# EAGLE board ratFinkSmall (EAGLE 8.4.1)
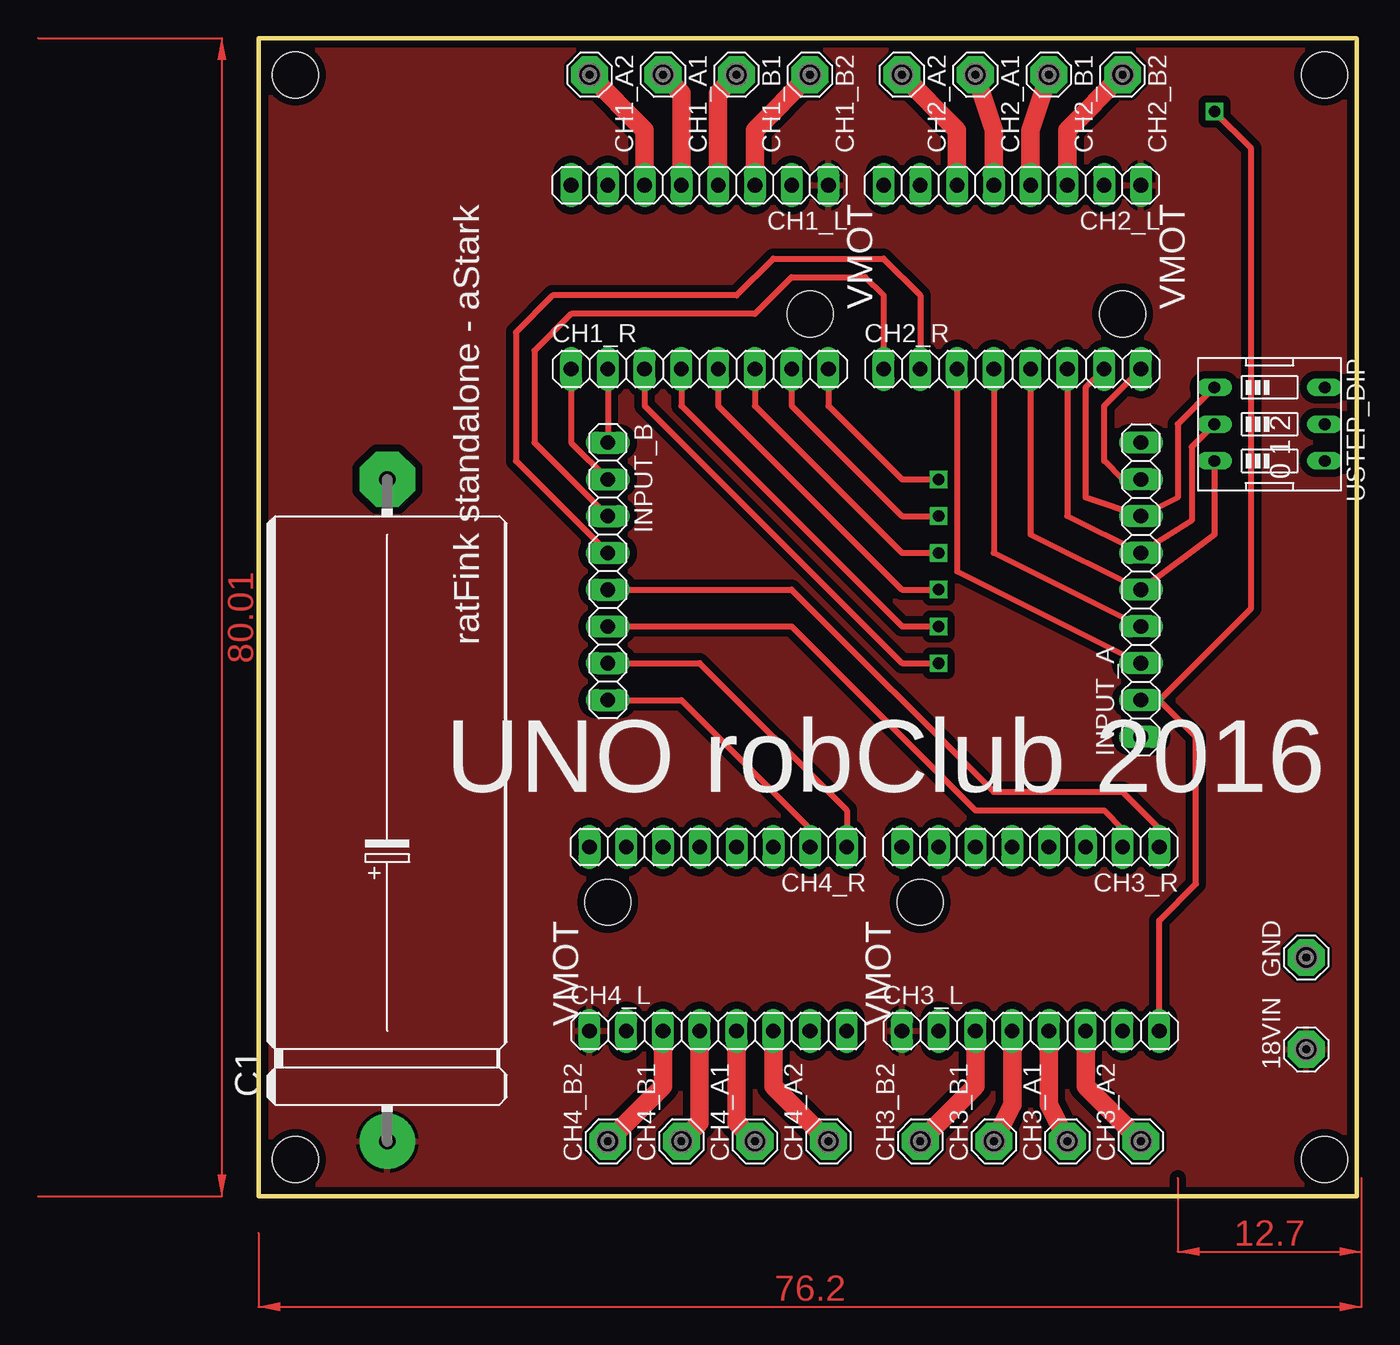
[diagram p0: board, top side]
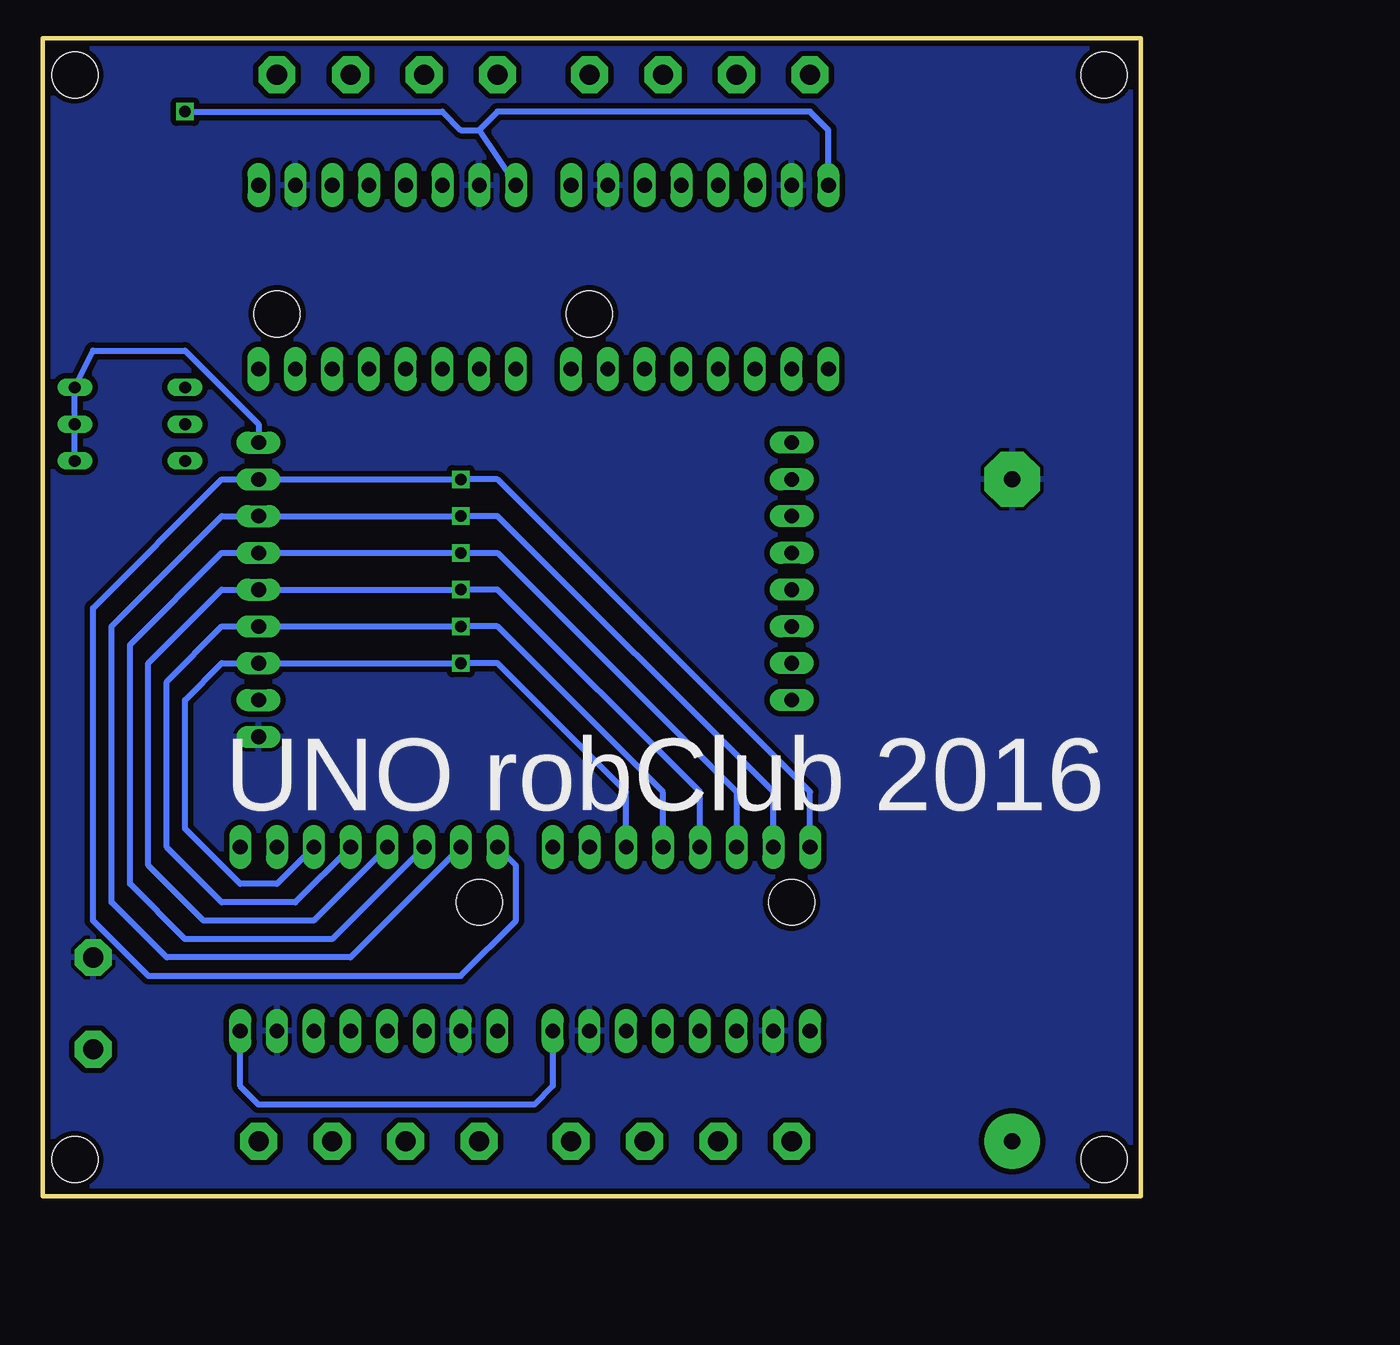
[diagram p1: board, bottom side, seen from below]

Size 75.87 x 80 mm. Coordinates in mm from the lower left corner, seen from the top.
Outline: 0,0 75.87,0 75.87,80 0,80 0,0
Copper layers (1*16): Top 0.0356mm / dielectric 1.5011mm / Bottom 0.0356mm
Design rules "oshpark-2layer *": minimum track width 6mil, minimum drill 13mil, track to track 10mil, track to pad 6mil, pad to pad 6mil, via to via 6mil, smd to smd 6mil, copper to edge 15mil, drill to drill 6mil, minimum pad ring 7mil, minimum via ring 7mil, stop-mask expansion 2.5mil, vias tented up to drill 0mil, thermal gap 10mil
Holes 3.17 mm at 2.54,77.47 73.66,77.47 73.66,2.54 2.54,2.54 38.1,60.96 59.69,60.96 45.72,20.32 24.13,20.32

## Footprints (pad centres in the part's own frame; a part is rotated, then mirrored left to right if it is on the bottom)
SE14 = drill 1.397 pad 2.54 octagon: MP 0,0
E45-16 = drill 1.118 pad 3.81: + -22.86,0 | drill 1.118 pad 3.81 octagon: - 22.86,0
1X08 = drill 1.016 long: 1 -8.89,0; 2 -6.35,0; 3 -3.81,0; 4 -1.27,0; 5 1.27,0; 6 3.81,0; 7 6.35,0; 8 8.89,0
1X09 = drill 1.016 long: 1 -10.16,0; 2 -7.62,0; 3 -5.08,0; 4 -2.54,0; 5 0,0; 6 2.54,0; 7 5.08,0; 8 7.62,0; 9 10.16,0
EDG-03 = drill 0.813 long: 1 -2.54,-3.81; 2 0,-3.81; 3 2.54,-3.81; 4 2.54,3.81; 5 0,3.81; 6 -2.54,3.81

## Placement (x,y rotation side)
18VIN  SE14  [SE14]  72.39,10.16 90 top
C1  100 uF  [E45-16]  8.89,26.67 90 top
CH1_A1  SE14  [SE14]  27.94,77.47 270 top
CH1_A2  SE14  [SE14]  22.86,77.47 270 top
CH1_B1  SE14  [SE14]  33.02,77.47 270 top
CH1_B2  SE14  [SE14]  38.1,77.47 270 top
CH1_L  [1X08]  30.48,69.85 180 top
CH1_R  [1X08]  30.48,57.15 0 top
CH2_A1  SE14  [SE14]  49.53,77.47 270 top
CH2_A2  SE14  [SE14]  44.45,77.47 270 top
CH2_B1  SE14  [SE14]  54.61,77.47 270 top
CH2_B2  SE14  [SE14]  59.69,77.47 270 top
CH2_L  [1X08]  52.07,69.85 180 top
CH2_R  [1X08]  52.07,57.15 0 top
CH3_A1  SE14  [SE14]  55.88,3.81 90 top
CH3_A2  SE14  [SE14]  60.96,3.81 90 top
CH3_B1  SE14  [SE14]  50.8,3.81 90 top
CH3_B2  SE14  [SE14]  45.72,3.81 90 top
CH3_L  [1X08]  53.34,11.43 0 top
CH3_R  [1X08]  53.34,24.13 180 top
CH4_A1  SE14  [SE14]  34.29,3.81 90 top
CH4_A2  SE14  [SE14]  39.37,3.81 90 top
CH4_B1  SE14  [SE14]  29.21,3.81 90 top
CH4_B2  SE14  [SE14]  24.13,3.81 90 top
CH4_L  [1X08]  31.75,11.43 0 top
CH4_R  [1X08]  31.75,24.13 180 top
GND  SE14  [SE14]  72.39,16.51 90 top
INPUT_A  [1X09]  60.96,41.91 90 top
INPUT_B  [1X08]  24.13,43.18 270 top
USTEP_DIP  [EDG-03]  69.85,53.34 270 top

## Library data of the parts
18VIN CH1_A1 CH1_A2 CH1_B1 CH1_B2 CH2_A1 CH2_A2 CH2_B1 CH2_B2 CH3_A1 CH3_A2 CH3_B1 CH3_B2 CH4_A1 CH4_A2 CH4_B1 CH4_B2 GND = solpad
C1 = resistor
CH1_L CH1_R CH2_L CH2_R CH3_L CH3_R CH4_L CH4_R INPUT_A INPUT_B = pinhead
USTEP_DIP = special

## Nets
5VIN: INPUT_A.9 USTEP_DIP.4 USTEP_DIP.5 USTEP_DIP.6
18VIN: 18VIN.MP C1.+ CH1_L.1 CH2_L.1 CH3_L.1 CH4_L.1
CH1_A1: CH1_A1.MP CH1_L.5
CH1_A2: CH1_A2.MP CH1_L.6
CH1_B1: CH1_B1.MP CH1_L.4
CH1_B2: CH1_B2.MP CH1_L.3
CH2_A1: CH2_A1.MP CH2_L.5
CH2_A2: CH2_A2.MP CH2_L.6
CH2_B1: CH2_B1.MP CH2_L.4
CH2_B2: CH2_B2.MP CH2_L.3
CH3_A1: CH3_A1.MP CH3_L.5
CH3_A2: CH3_A2.MP CH3_L.6
CH3_B1: CH3_B1.MP CH3_L.4
CH3_B2: CH3_B2.MP CH3_L.3
CH4_A1: CH4_A1.MP CH4_L.5
CH4_A2: CH4_A2.MP CH4_L.6
CH4_B1: CH4_B1.MP CH4_L.4
CH4_B2: CH4_B2.MP CH4_L.3
EN: CH1_R.8 CH2_R.8 CH3_R.8 CH4_R.8 INPUT_A.8
FLT: CH1_L.8 CH2_L.8 CH3_L.8 CH4_L.8 INPUT_A.2
GND: C1.- CH1_L.2 CH1_L.7 CH2_L.2 CH2_L.7 CH3_L.2 CH3_L.7 CH4_L.2 CH4_L.7 GND.MP INPUT_A.1
M0: CH1_R.7 CH2_R.7 CH3_R.7 CH4_R.7 INPUT_A.7 USTEP_DIP.1
M1: CH1_R.6 CH2_R.6 CH3_R.6 CH4_R.6 INPUT_A.6 USTEP_DIP.2
M2: CH1_R.5 CH2_R.5 CH3_R.5 CH4_R.5 INPUT_A.5 USTEP_DIP.3
N$1: CH2_R.1 INPUT_B.3
N$2: CH1_R.2 INPUT_B.1
N$3: CH1_R.1 INPUT_B.2
N$4: CH2_R.2 INPUT_B.4
N$6: CH4_R.1 INPUT_B.7
N$7: CH4_R.2 INPUT_B.8
N$8: CH3_R.1 INPUT_B.5
N$9: CH3_R.2 INPUT_B.6
RST: CH1_R.4 CH2_R.4 CH3_R.4 CH4_R.4 INPUT_A.4
SLP: CH1_R.3 CH2_R.3 CH3_R.3 CH4_R.3 INPUT_A.3

## Tracks (layer width: path | path; a pad name or v marks a point on that pad's centre or on a via)
5VIN
  Bottom 0.406: USTEP_DIP.4 USTEP_DIP.5 USTEP_DIP.6 72.39,58.42 66.04,58.42 60.96,53.34 INPUT_A.9
18VIN
  pour Top (isolate 0.508): 0,80.01 76.2,80.01 76.2,0 0,0
CH1_A1
  Top 1.27: CH1_A1.MP 29.21,76.2 CH1_L.5
CH1_A2
  Top 1.27: CH1_A2.MP 26.67,73.66 CH1_L.6
CH1_B1
  Top 1.27: CH1_B1.MP 31.75,76.2 CH1_L.4
CH1_B2
  Top 1.27: CH1_B2.MP 34.29,73.66 CH1_L.3
CH2_A1
  Top 1.27: CH2_A1.MP 50.8,73.66 CH2_L.5
CH2_A2
  Top 1.27: CH2_A2.MP 48.26,73.66 CH2_L.6
CH2_B1
  Top 1.27: CH2_B1.MP 53.34,73.66 CH2_L.4
CH2_B2
  Top 1.27: CH2_B2.MP 55.88,73.66 CH2_L.3
CH3_A1
  Top 1.27: CH3_A1.MP 54.61,6.35 CH3_L.5
CH3_A2
  Top 1.27: CH3_A2.MP 57.15,7.62 CH3_L.6
CH3_B1
  Top 1.27: CH3_B1.MP 52.07,6.35 CH3_L.4
CH3_B2
  Top 1.27: CH3_B2.MP 49.53,7.62 CH3_L.3
CH4_A1
  Top 1.27: CH4_A1.MP 33.02,5.08 CH4_L.5
CH4_A2
  Top 1.27: CH4_A2.MP 35.56,7.62 CH4_L.6
CH4_B1
  Top 1.27: CH4_B1.MP 30.48,5.08 CH4_L.4
CH4_B2
  Top 1.27: CH4_B2.MP 27.94,7.62 CH4_L.3
EN  (via drill 0.8)
  Top 0.406: CH1_R.8 39.37,54.61 44.45,49.53 v46.99,49.53 | INPUT_A.8 59.69,49.53 58.42,50.8 58.42,54.61 CH2_R.8
  Bottom 0.406: CH4_R.8 22.86,27.94 44.45,49.53 v46.99,49.53 INPUT_A.8 63.5,49.53 72.39,40.64 72.39,19.05 68.58,15.24 46.99,15.24 43.18,19.05 43.18,22.86 CH3_R.8
FLT  (via drill 0.8)
  Top 0.406: CH3_L.8 62.23,19.05 64.77,21.59 64.77,31.75 62.23,34.29 | 62.23,34.29 INPUT_A.2 62.23,34.29 | v66.04,74.93 68.58,72.39 68.58,40.64 62.23,34.29
  Bottom 0.406: CH1_L.8 21.59,73.66 22.86,74.93 44.45,74.93 45.72,73.66 | 45.72,73.66 CH2_L.8 | CH4_L.8 40.64,7.62 41.91,6.35 60.96,6.35 62.23,7.62 CH3_L.8 | v66.04,74.93 48.26,74.93 46.99,73.66 45.72,73.66
GND
  pour Bottom (isolate 0.381): 0,80.01 76.2,80.01 76.2,0 0,0
M0  (via drill 0.8)
  Top 0.406: CH1_R.7 36.83,54.61 44.45,46.99 v46.99,46.99 | CH2_R.7 57.15,55.88 57.15,48.26 INPUT_A.7 63.5,48.26 63.5,53.34 USTEP_DIP.1
  Bottom 0.406: CH4_R.7 25.4,27.94 44.45,46.99 v46.99,46.99 INPUT_A.7 63.5,46.99 71.12,39.37 71.12,20.32 67.31,16.51 54.61,16.51 CH3_R.7
M1  (via drill 0.8)
  Top 0.406: CH2_R.6 55.88,46.99 INPUT_A.6 64.47,46.69 64.47,51.77 USTEP_DIP.2 | CH1_R.6 34.29,54.61 44.45,44.45 v46.99,44.45
  Bottom 0.406: CH4_R.6 27.94,27.94 44.45,44.45 v46.99,44.45 INPUT_A.6 63.5,44.45 69.85,38.1 69.85,21.59 66.04,17.78 55.88,17.78 CH3_R.6
M2  (via drill 0.8)
  Top 0.406: CH1_R.5 31.75,54.61 44.45,41.91 v46.99,41.91 | CH2_R.5 53.34,45.72 INPUT_A.5 66.04,45.72 USTEP_DIP.3
  Bottom 0.406: CH4_R.5 30.48,27.94 44.45,41.91 v46.99,41.91 INPUT_A.5 63.5,41.91 68.58,36.83 68.58,22.86 64.77,19.05 57.15,19.05 CH3_R.5
N$1
  Top 0.406: CH2_R.1 43.18,62.23 41.91,63.5 36.83,63.5 34.29,60.96 21.59,60.96 19.05,58.42 19.05,52.07 INPUT_B.3
N$2
  Top 0.406: CH1_R.2 INPUT_B.1
N$3
  Top 0.406: CH1_R.1 21.59,52.07 INPUT_B.2
N$4
  Top 0.406: CH2_R.2 45.72,62.23 43.18,64.77 35.56,64.77 33.02,62.23 20.32,62.23 17.78,59.69 17.78,50.8 INPUT_B.4
N$6
  Top 0.406: INPUT_B.7 30.48,36.83 40.64,26.67 CH4_R.1
N$7
  Top 0.406: INPUT_B.8 29.21,34.29 38.1,25.4 CH4_R.2
N$8
  Top 0.406: INPUT_B.5 36.83,41.91 50.8,27.94 59.69,27.94 62.23,25.4 CH3_R.1
N$9
  Top 0.406: INPUT_B.6 36.83,39.37 49.53,26.67 58.42,26.67 59.69,25.4 CH3_R.2
RST  (via drill 0.8)
  Top 0.406: CH2_R.4 50.8,44.45 INPUT_A.4 | CH1_R.4 29.21,54.61 44.45,39.37 v46.99,39.37
  Bottom 0.406: CH4_R.4 33.02,27.94 44.45,39.37 v46.99,39.37 INPUT_A.4 63.5,39.37 67.31,35.56 67.31,24.13 63.5,20.32 58.42,20.32 CH3_R.4
SLP  (via drill 0.8)
  Top 0.406: CH2_R.3 48.26,43.18 INPUT_A.3 | CH1_R.3 26.67,54.61 44.45,36.83 v46.99,36.83
  Bottom 0.406: CH4_R.3 35.56,27.94 44.45,36.83 v46.99,36.83 INPUT_A.3 63.5,36.83 66.04,34.29 66.04,25.4 62.23,21.59 59.69,21.59 CH3_R.3
(copper drawn outside any net)
  shapes: Top area x3

## Text on the board
tPlace: VMOT | VMOT | VMOT | VMOT
tNames: 0 1 2 | ratFink standalone - aStark | UNO robClub 2016
bNames: UNO robClub 2016